# EAGLE board rev1 (EAGLE 9.6.0)
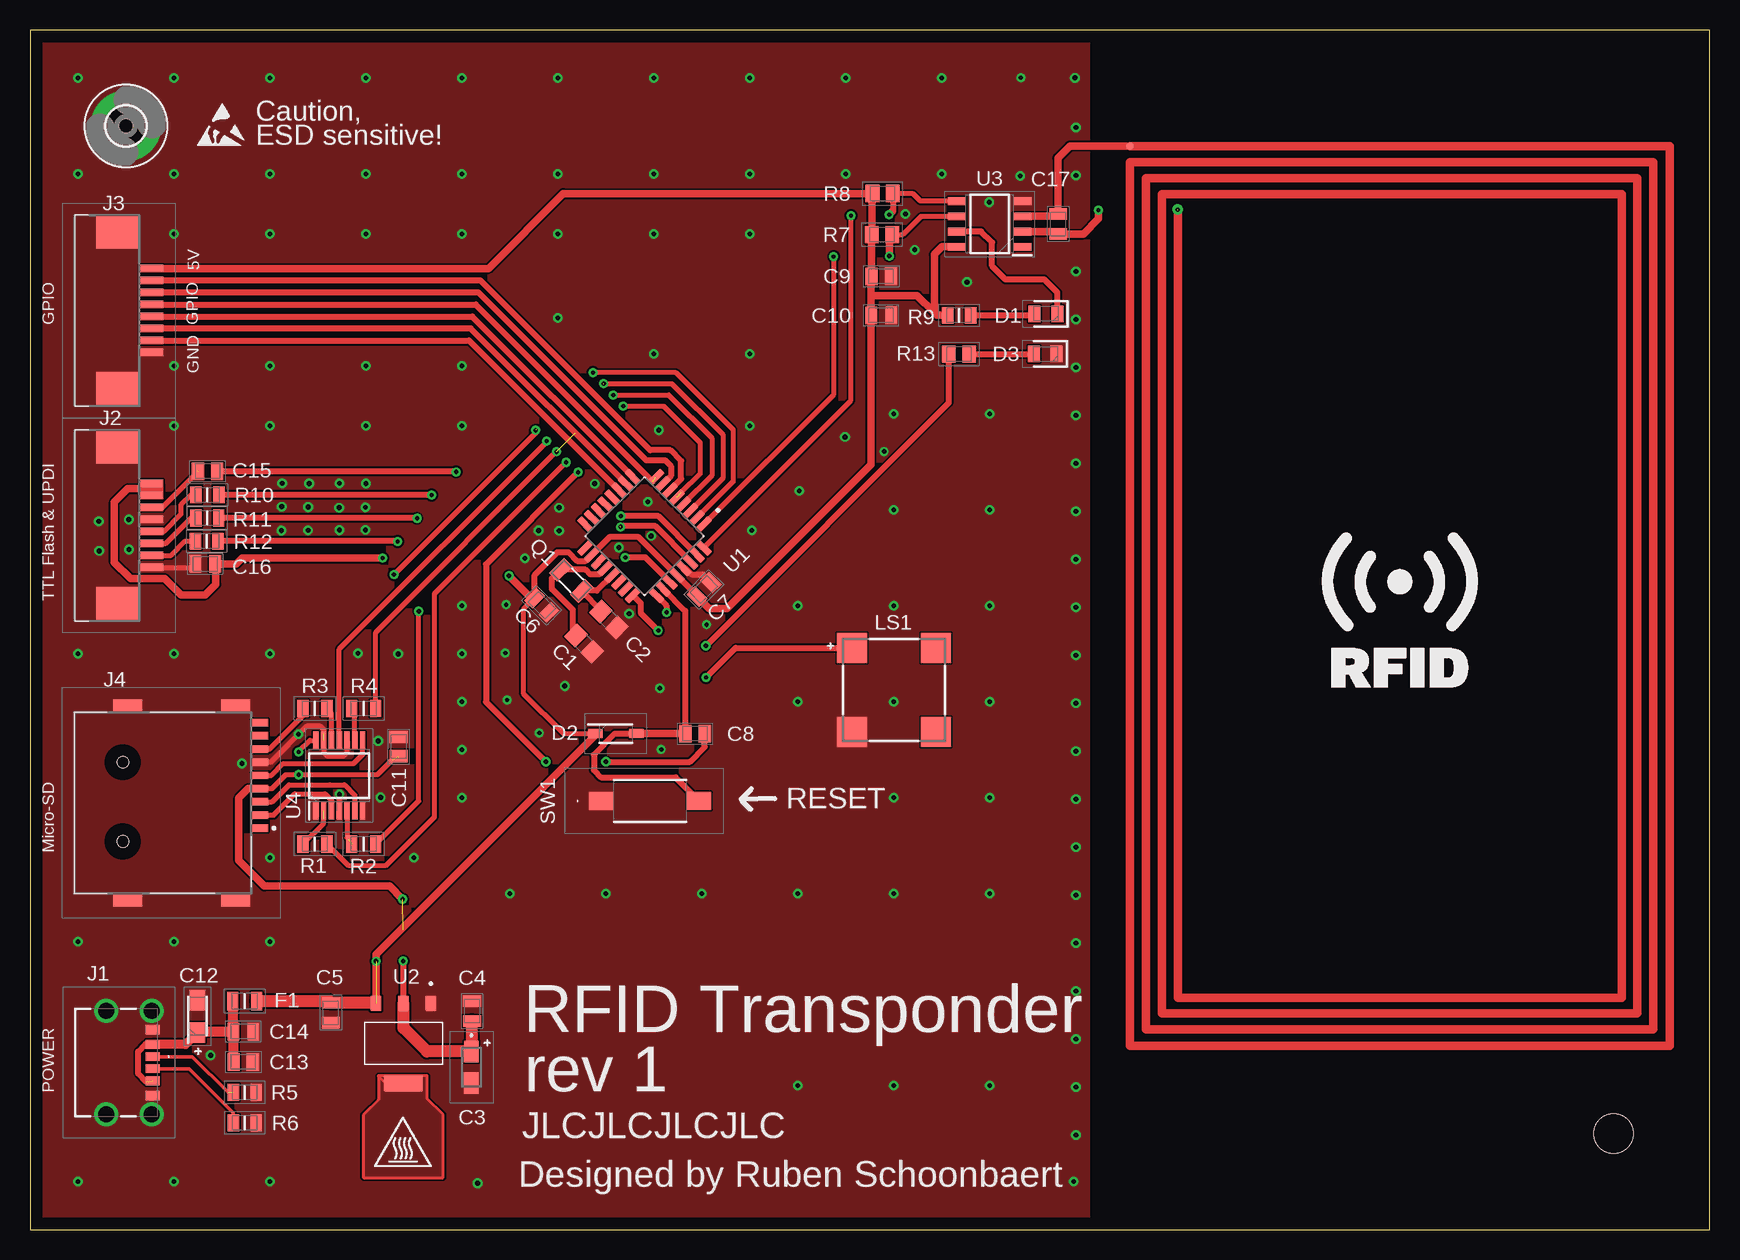
[diagram p0: board, top side]
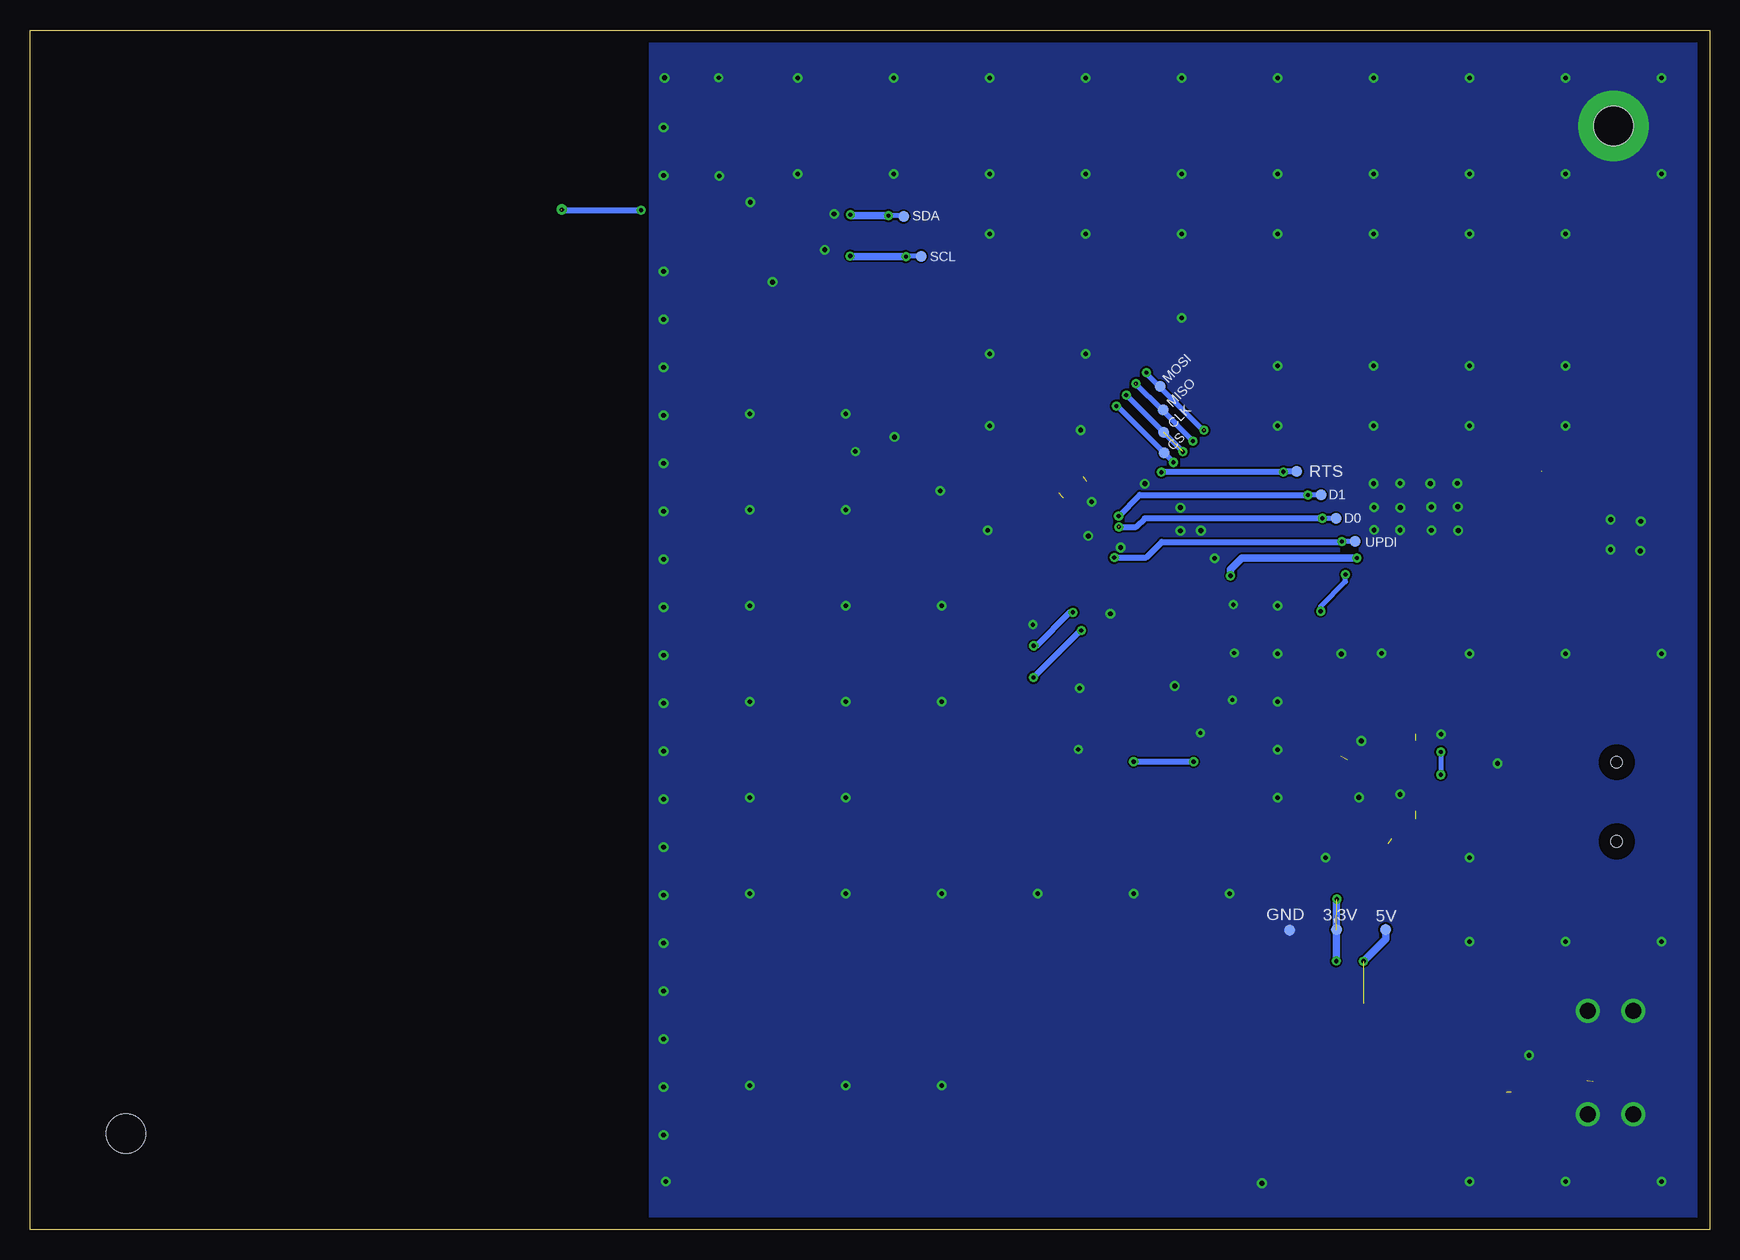
[diagram p1: board, bottom side, seen from below]

Size 140 x 100 mm. Coordinates in mm from the lower left corner, seen from the top.
Outline: 0,0 140,0 140,100 0,100 0,0
Copper layers (1*16): Top 0.035mm / dielectric 1.5mm / Bottom 0.035mm
Design rules "default *": minimum track width 6mil, minimum drill 0.35mm, track to track 6mil, track to pad 6mil, pad to pad 6mil, via to via 6mil, smd to smd 6mil, copper to edge 40mil, drill to drill 6mil, minimum pad ring 10mil, minimum via ring 8mil, stop-mask expansion 4mil, vias tented up to drill 15mm, thermal gap 10mil
Holes 3.3 mm at 132,8 8,92

## Footprints (pad centres in the part's own frame; a part is rotated, then mirrored left to right if it is on the bottom)
C0805 = smd 1.3 x 1.5: 1 -0.95,0; 2 0.95,0
T491A = smd 1.8 x 1.23: 1 -1.31,0; 2 1.31,0
CAPC2012X145N = smd 0.97 x 1.47: 1 -0.83,0; 2 0.83,0
CAPC2012X94N = smd 1.02 x 1.47: 1 -0.81,0; 2 0.81,0
CAPPM3216X180N = smd 1.7 x 1.3: 1 -1.35,0; 2 1.35,0
LEDC2012X80N = smd 1 x 1.4: 1 -0.95,0; 2 0.95,0
SOD3716X145N = smd 1.2 x 0.75: 1 -1.7,0; 2 1.7,0
FUSC2114X125N = smd 0.93 x 1.52: 1 -1,0; 2 1,0
3,3-PAD = drill 3.3 pad 5.842: B3,3 0,0
1016435900011LF = smd 0.7 x 1.2: A5 -0.5,3.03; B5 0.5,3.03 | smd 0.76 x 1.2: A9 1.52,3.03; B9 -1.52,3.03 | smd 0.8 x 1.2: A12 2.75,3.03; B12 -2.75,3.03 | drill 1.34 pad 1.85: MH1 -4.32,2.95; MH2 4.32,2.95 | drill 1.34 pad 2.01: MH3 -4.32,-0.85; MH4 4.32,-0.85
849528 = smd 0.61 x 2: 1 -3.5,3.2; 2 -2.5,3.2; 3 -1.5,3.2; 4 -0.5,3.2; 5 0.5,3.2; 6 1.5,3.2; 7 2.5,3.2; 8 3.5,3.2 | smd 2.68 x 3.6: MP1 -6.49,0.4; MP2 6.49,0.4
MEM20750014001A = smd 0.62 x 1.4: 1 2.105,7.725; 2 1.005,7.725; 3 -0.095,7.725; 4 -1.195,7.725; 5 -2.295,7.725; 6 -3.395,7.725; 7 -4.495,7.725; 8 -5.595,7.725; 9 -6.695,7.725 | smd 1.1 x 2.4: 10 -8.075,5.725; 11 -8.075,-3.275; 12 8.075,-3.275; 13 8.075,5.725 | hole 0.95: -3.395,-3.695; 3.205,-3.695
CMT-8540S-SMT-TR = smd 2.5 x 2.5: 1 -3.5,-3.5; 2 3.5,-3.5; 3 3.5,3.5; 4 -3.5,3.5
3.2X1.5 = smd 1 x 1.8: 1 -1.25,0; 2 1.25,0
RESC2012X50N = smd 0.95 x 1.45: 1 -1,0; 2 1,0
RESC2012X60N = smd 0.95 x 1.4: 1 -0.95,0; 2 0.95,0
RESC2012X65N = smd 1.15 x 1.45: 1 -0.85,0; 2 0.85,0
PTS636SM50SMTRLFS = smd 2 x 1.5: 1 -4.1,0; 2 4.1,0
TP09R = smd 0.9 x 0.9: TP 0,0
QFP80P900X900X120-32N = smd 1.47 x 0.55: 1 -4.17,2.8; 2 -4.17,2; 3 -4.17,1.2; 4 -4.17,0.4; 5 -4.17,-0.4; 6 -4.17,-1.2; 7 -4.17,-2; 8 -4.17,-2.8; 17 4.17,-2.8; 18 4.17,-2; 19 4.17,-1.2; 20 4.17,-0.4; 21 4.17,0.4; 22 4.17,1.2; 23 4.17,2; 24 4.17,2.8 | smd 0.55 x 1.47: 9 -2.8,-4.17; 10 -2,-4.17; 11 -1.2,-4.17; 12 -0.4,-4.17; 13 0.4,-4.17; 14 1.2,-4.17; 15 2,-4.17; 16 2.8,-4.17; 25 2.8,4.17; 26 2,4.17; 27 1.2,4.17; 28 0.4,4.17; 29 -0.4,4.17; 30 -1.2,4.17; 31 -2,4.17; 32 -2.8,4.17
SOT229P700X180-4N = smd 1.31 x 0.93: 1 -3.345,2.29; 2 -3.345,0; 3 -3.345,-2.29 | smd 1.31 x 3.24: 4 3.345,0
SOIC127P600X175-8N = smd 1.525 x 0.65: 1 -2.712,1.905; 2 -2.712,0.635; 3 -2.712,-0.635; 4 -2.712,-1.905; 5 2.712,-1.905; 6 2.712,-0.635; 7 2.712,0.635; 8 2.712,1.905
SOP65P640X110-14N = smd 1.475 x 0.45: 1 -2.938,1.95; 2 -2.938,1.3; 3 -2.938,0.65; 4 -2.938,0; 5 -2.938,-0.65; 6 -2.938,-1.3; 7 -2.938,-1.95; 8 2.938,-1.95; 9 2.938,-1.3; 10 2.938,-0.65; 11 2.938,0; 12 2.938,0.65; 13 2.938,1.3; 14 2.938,1.95
RF_COIL = drill 0.35: P$1 4,-5.3 | smd 0.635 x 0.635: P$3 0,0

## Placement (x,y rotation side)
C1  18pF  [C0805]  46.19,48.84 135 top
C2  18pF  [C0805]  48.25,50.85 135 top
C3  T491A226K004AT  [T491A]  36.8,13.53 270 top
C4  GRM21BR61C106KE15K  [CAPC2012X145N]  36.85,18.21 270 top
C5  GRM21BR61C106KE15K  [CAPC2012X145N]  25.08,18.08 90 top
C6  GRM21BR61C106KE15K  [CAPC2012X145N]  42.65,52.03 135 top
C7  08055C104KAT2A  [CAPC2012X94N]  56.17,53.35 45 top
C8  08055C104KAT2A  [CAPC2012X94N]  55.43,41.34 180 top
C9  08055C104KAT2A  [CAPC2012X94N]  70.95,79.47 0 top
C10  GRM21BR61C106KE15K  [CAPC2012X145N]  70.95,76.21 0 top
C11  08055C104KAT2A  [CAPC2012X94N]  30.73,40.26 270 top
C12  TAJA106K010YNJ  [CAPPM3216X180N]  13.97,17.78 90 top
C13  08055C104KAT2A  [CAPC2012X94N]  17.78,13.97 0 top
C14  GRM21BR61C106KE15K  [CAPC2012X145N]  17.78,16.51 0 top
C15  08055C104KAT2A  [CAPC2012X94N]  14.8,63.22 180 top
C16  GRM21BR61C106KE15K  [CAPC2012X145N]  14.61,55.5 0 top
C17  GRM21BR61C106KE15K  [CAPC2012X145N]  85.7,83.83 90 top
D1  SML-LXT0805GW-TR  [LEDC2012X80N]  84.69,76.34 180 top
D2  MMSZ5231B-7-F  [SOD3716X145N]  48.83,41.34 0 top
D3  SML-LXT0805GW-TR  [LEDC2012X80N]  84.63,73 180 top
F1  SMD0805B050TF  [FUSC2114X125N]  17.91,19.05 0 top
H1  MOUNT-PAD-ROUND3.3  [3,3-PAD]  8,92 0 top
J1  10164359-00011LF  [1016435900011LF]  7.2,13.91 270 top
J2  84952-8  [849528]  6.91,58.7 270 top
J3  84952-8  [849528]  6.91,76.62 270 top
J4  MEM2075-00-140-01-A  [MEM20750014001A]  11.43,35.56 270 top
LS1  CMT-8540S-SMT-TR  [CMT-8540S-SMT-TR]  72,45 270 top
Q1  32.768Khz  [3.2X1.5]  45.12,54.12 135 top
R1  CRCW08053K30FKEA  [RESC2012X50N]  23.75,32.13 180 top
R2  CRCW08053K30FKEA  [RESC2012X50N]  27.81,32.13 180 top
R3  CRCW08053K30FKEA  [RESC2012X50N]  23.75,43.43 180 top
R4  CRCW08053K30FKEA  [RESC2012X50N]  27.81,43.43 0 top
R5  RC0805FR-0710KL  [RESC2012X60N]  17.91,11.43 180 top
R6  RC0805FR-0710KL  [RESC2012X60N]  17.91,8.89 180 top
R7  RNCP0805FTD1K00  [RESC2012X65N]  71.02,82.94 180 top
R8  RNCP0805FTD1K00  [RESC2012X65N]  71.07,86.37 180 top
R9  RC0805FR-0710KL  [RESC2012X60N]  77.45,76.21 0 top
R10  RC0805FR-0710KL  [RESC2012X60N]  14.79,61.25 180 top
R11  RC0805FR-0710KL  [RESC2012X60N]  14.78,59.32 180 top
R12  RC0805FR-0710KL  [RESC2012X60N]  14.73,57.38 180 top
R13  RNCP0805FTD1K00  [RESC2012X65N]  77.44,72.98 0 top
SW1  TACTWITCH  [PTS636SM50SMTRLFS]  51.69,35.74 0 top
TP1  TPTP09R  [TP09R]  34.41,63.19 0 bottom
TP2  TPTP09R  [TP09R]  32.38,61.23 0 bottom
TP3  TPTP09R  [TP09R]  31.13,59.29 0 bottom
TP4  TPTP09R  [TP09R]  29.56,57.37 0 bottom
TP5  TPTP09R  [TP09R]  65.71,81.13 0 bottom
TP6  TPTP09R  [TP09R]  67.18,84.45 0 bottom
TP7  TPTP09R  [TP09R]  31.09,25 0 bottom
TP8  TPTP09R  [TP09R]  45.45,64.73 0 bottom
TP9  TPTP09R  [TP09R]  45.81,70.28 0 bottom
TP10  TPTP09R  [TP09R]  45.49,66.45 0 bottom
TP11  TPTP09R  [TP09R]  45.56,68.32 0 bottom
TP12  TPTP09R  [TP09R]  27,25 0 bottom
TP13  TPTP09R  [TP09R]  35,24.95 0 bottom
U1  ATMEGA3208-AFR  [QFP80P900X900X120-32N]  51.22,57.8 225 top
U2  AMS1117-3.3  [SOT229P700X180-4N]  31.13,15.51 270 top
U3  ST25DV16KC-IE6S3  [SOIC127P600X175-8N]  79.99,83.83 180 top
U4  74LVC125APW,118  [SOP65P640X110-14N]  25.78,37.85 90 top
U$1  RF-ANT  [RF_COIL]  91.67,90.33 0 top

## Library data of the parts
C1 C2 = rcl; SPICEPREFIX: C
C3 = SamacSys_Parts; DESCRIPTION: T491, Tantalum, MnO2 Tantalum, Commercial Grade, 22 uF, 10%, 4 VDC, 125C, -55C, 85C, SMD, MnO2, Molded, 6 % , 3.5 Ohms, 900 nA, 58.6 mg, 3216, 1.6mm, Height Max = 1.8mm, 2000, 156 Weeks; HEIGHT: 1.8mm; MANUFACTURER_NAME: KEMET; MANUFACTURER_PART_NUMBER: T491A226K004AT; MOUSER_PART_NUMBER: 80-T491A226K004AT; MOUSER_PRICE-STOCK: https://www.mouser.com/Search/Refine.aspx?Keyword=80-T491A226K004AT
C4-C6 C10 C14 C16 C17 = SamacSys_Parts; DESCRIPTION: Murata, 0805 (2012M) 10uF Multilayer Ceramic Capacitor MLCC 16V dc +/-10% , SMD GRM21BR61C106KE15K; HEIGHT: 1.45mm; MANUFACTURER_NAME: Murata Electronics; MANUFACTURER_PART_NUMBER: GRM21BR61C106KE15K; MOUSER_PART_NUMBER: 81-GRM21BR61C106KE5K; MOUSER_PRICE-STOCK: https://www.mouser.co.uk/ProductDetail/Murata-Electronics/GRM21BR61C106KE15K?qs=h0WOCFF19ULjTOS37upAEw%3D%3D
C7-C9 C11 C13 C15 = SamacSys_Parts; DESCRIPTION: 0805 X7R ceramic capacitor,100nF 50V AVX 0805 Standard 100nF Ceramic Multilayer Capacitor, 50 V dc, +125degC, X7R Dielectric, /-10% SMD; HEIGHT: 0.94mm; MANUFACTURER_NAME: AVX; MANUFACTURER_PART_NUMBER: 08055C104KAT2A; MOUSER_PART_NUMBER: 581-08055C104K; MOUSER_PRICE-STOCK: https://www.mouser.co.uk/ProductDetail/AVX/08055C104KAT2A?qs=2ujN4bDBNE9mJvapP%252BjopA%3D%3D
C12 = SamacSys_Parts; DESCRIPTION: Tantalum Capacitors - Solid SMD 10volts 10uF 10%; HEIGHT: 1.8mm; MANUFACTURER_NAME: AVX; MANUFACTURER_PART_NUMBER: TAJA106K010YNJ; MOUSER_PART_NUMBER: 581-TAJA106K010YNJ; MOUSER_PRICE-STOCK: https://www.mouser.com/Search/Refine.aspx?Keyword=581-TAJA106K010YNJ
D1 D3 = SamacSys_Parts; DESCRIPTION: LED,0805,Surface Mount,QuasarBrite Lumex SML-LXT0805GW-TR Green LED, 565 nm, 0805 Diffused, Rectangle Lens SMD Package; HEIGHT: 0.8mm; MANUFACTURER_NAME: Lumex; MANUFACTURER_PART_NUMBER: SML-LXT0805GW-TR; MOUSER_PART_NUMBER: 696-SML-LXT0805GW; MOUSER_PRICE-STOCK: https://www.mouser.co.uk/ProductDetail/Lumex/SML-LXT0805GW-TR?qs=9HInCHf8eFiVOx4SP694cA%3D%3D
D2 = SamacSys_Parts; DESCRIPTION: Zener Diode 5.1V 5% 500mW SOD123 Diodes Inc MMSZ5231B-7-F Zener Diode, 5.1V 5% 0.5 W SMT 2-Pin SOD-123; HEIGHT: 1.45mm; MANUFACTURER_NAME: Diodes Inc.; MANUFACTURER_PART_NUMBER: MMSZ5231B-7-F; MOUSER_PART_NUMBER: 621-MMSZ5231B-F; MOUSER_PRICE-STOCK: https://www.mouser.co.uk/ProductDetail/Diodes-Incorporated/MMSZ5231B-7-F?qs=2ygBApjwyeMh7Sf0YL1qSw%3D%3D
F1 = SamacSys_Parts; DESCRIPTION: Resettable Fuses - PPTC PPTC 6V 0.5A; HEIGHT: 1.25mm; MANUFACTURER_NAME: YAGEO; MANUFACTURER_PART_NUMBER: SMD0805B050TF; MOUSER_PART_NUMBER: 603-SMD0805B050TF; MOUSER_PRICE-STOCK: https://www.mouser.co.uk/ProductDetail/YAGEO/SMD0805B050TF?qs=0lSvoLzn4L91PoLHRQNgaQ%3D%3D
H1 = holes
J1 = SamacSys_Parts; DESCRIPTION: USB Type C Receptacle SMT Single Row 6Pin; HEIGHT: 3.41mm; MANUFACTURER_NAME: Amphenol; MANUFACTURER_PART_NUMBER: 10164359-00011LF; MOUSER_PART_NUMBER: 649-10164359-00011LF; MOUSER_PRICE-STOCK: https://www.mouser.co.uk/ProductDetail/Amphenol-FCI/10164359-00011LF?qs=MyNHzdoqoQLpQ%2FmSqA1%252BtQ%3D%3D
J2 J3 = SamacSys_Parts; DESCRIPTION: 8 way r/a bottom FFC SMT connector,1mm; HEIGHT: 2.74mm; MANUFACTURER_NAME: TE Connectivity; MANUFACTURER_PART_NUMBER: 84952-8; MOUSER_PART_NUMBER: 571-84952-8; MOUSER_PRICE-STOCK: https://www.mouser.co.uk/ProductDetail/TE-Connectivity/84952-8?qs=uUkeXfjQ8uTKEYAHE0dNDQ%3D%3D
J4 = SamacSys_Parts; DESCRIPTION: GCT (GLOBAL CONNECTOR TECHNOLOGY) - MEM2075-00-140-01-A - MICRO SD CARD CONN, PUSH-PUSH, 9POS, SMT; HEIGHT: mm; MANUFACTURER_NAME: GCT (GLOBAL CONNECTOR TECHNOLOGY); MANUFACTURER_PART_NUMBER: MEM2075-00-140-01-A; MOUSER_PART_NUMBER: 640-MEM20750014001A; MOUSER_PRICE-STOCK: https://www.mouser.co.uk/ProductDetail/GCT/MEM2075-00-140-01-A?qs=KUoIvG%2F9IlZvfWpeERlq3Q%3D%3D
LS1 = SamacSys_Parts; DESCRIPTION: MAGNETIC BUZZER TRANSDUCER, 4000 Hz; HEIGHT: mm; MANUFACTURER_NAME: CUI Devices; MANUFACTURER_PART_NUMBER: CMT-8540S-SMT-TR; MOUSER_PART_NUMBER: 490-CMT-8540S-SMT-TR; MOUSER_PRICE-STOCK: https://www.mouser.co.uk/ProductDetail/CUI-Devices/CMT-8540S-SMT-TR?qs=qCxwlXJ4fnyb8bN8CSFJVw%3D%3D
Q1 = crystal-geyer_V1_0
R1-R4 = SamacSys_Parts; DESCRIPTION: CRCW0805 Resistor T/R 0.125W,1%,3K3 Vishay CRCW Series Thick Film Surface Mount Resistor 805 Case 3.3k +/-1% 0.125W +/-100ppm/C; HEIGHT: 0.5mm; MANUFACTURER_NAME: Vishay; MANUFACTURER_PART_NUMBER: CRCW08053K30FKEA; MOUSER_PART_NUMBER: 71-CRCW0805-3.3K-E3; MOUSER_PRICE-STOCK: https://www.mouser.co.uk/ProductDetail/Vishay-Dale/CRCW08053K30FKEA?qs=kJXytlGtIWkHrvHHExLW2Q%3D%3D
R5 R6 R9-R12 = SamacSys_Parts; DESCRIPTION: YAGEO - RC0805FR-0710KL - SMD Chip Resistor, 10 kohm, +/- 1%, 125 mW, 0805 [2012 Metric], Thick Film, General Purpose; HEIGHT: 0.6mm; MANUFACTURER_NAME: YAGEO; MANUFACTURER_PART_NUMBER: RC0805FR-0710KL; MOUSER_PART_NUMBER: 603-RC0805FR-0710KL; MOUSER_PRICE-STOCK: https://www.mouser.co.uk/ProductDetail/YAGEO/RC0805FR-0710KL?qs=7bY8808IzHq6vrU3BeiiYw%3D%3D
R7 R8 R13 = SamacSys_Parts; DESCRIPTION: RES, 1 Kohm, 0805, 1%, 100 ppm, 0.25W; HEIGHT: 0.65mm; MANUFACTURER_NAME: Stackpole Electronics, Inc.; MANUFACTURER_PART_NUMBER: RNCP0805FTD1K00; MOUSER_PART_NUMBER: 708-RNCP0805FTD1K00; MOUSER_PRICE-STOCK: https://www.mouser.co.uk/ProductDetail/SEI-Stackpole/RNCP0805FTD1K00?qs=FESYatJ8odKy9z1hnQn%252Bhg%3D%3D
SW1 = SamacSys_Parts
TP1-TP13 = testpad
U1 = ATMEGA3208-AFR; AVAILABILITY: In Stock; CHECK_PRICES: https://www.snapeda.com/parts/ATMEGA3208-AFR/Microchip/view-part/?ref=eda; DESCRIPTION: AVR megaAVR® 0, Functional Safety (FuSa) Microcontroller IC 8-Bit 20MHz 32KB (32K x 8) FLASH 32-TQFP (7x7); MF: Microchip; MP: ATMEGA3208-AFR; PACKAGE: TQFP-32 Microchip; PRICE: None; PURCHASE-URL: https://www.snapeda.com/api/url_track_click_mouser/?unipart_id=2762707&manufacturer=Microchip&part_name=ATMEGA3208-AFR&search_term=None; SNAPEDA_LINK: https://www.snapeda.com/parts/ATMEGA3208-AFR/Microchip/view-part/?ref=snap
U2 = AMS1117-3.3; AVAILABILITY: Not in stock; CHECK_PRICES: https://www.snapeda.com/parts/AMS1117-3.3/Advanced+Monolithic+Systems/view-part/?ref=eda; DESCRIPTION: Sot223/Pkg 1-Amp 3.3-Volt Low Drop Out Voltage Regulatator; MF: Advanced Monolithic Systems; MP: AMS1117-3.3; PACKAGE: SOT-223 Seeed Technology; PRICE: None; SNAPEDA_LINK: https://www.snapeda.com/parts/AMS1117-3.3/Advanced+Monolithic+Systems/view-part/?ref=snap
U3 = SamacSys_Parts; DESCRIPTION: Dynamic NFC/RFID tag IC with 16-Kbit EEPROM, and fast transfer mode capability; HEIGHT: 1.75mm; MANUFACTURER_NAME: STMicroelectronics; MANUFACTURER_PART_NUMBER: ST25DV16KC-IE6S3; MOUSER_PART_NUMBER: 511-ST25DV16KC-IE6S3; MOUSER_PRICE-STOCK: https://www.mouser.co.uk/ProductDetail/STMicroelectronics/ST25DV16KC-IE6S3?qs=QNEnbhJQKvbFHl9iSDOFGA%3D%3D
U4 = SamacSys_Parts; DESCRIPTION: 74LVC125A - Quad buffer/line driver with 5 V tolerant input/outputs; 3-state@en-us; HEIGHT: 1.1mm; MANUFACTURER_NAME: Nexperia; MANUFACTURER_PART_NUMBER: 74LVC125APW,118; MOUSER_PART_NUMBER: 771-74LVC125APW-T; MOUSER_PRICE-STOCK: https://www.mouser.co.uk/ProductDetail/Nexperia/74LVC125APW118?qs=me8TqzrmIYV8VAZOS5KVLw%3D%3D
U$1 = mijn-library

## Nets
+3V3: C3.1 C4.2 C11.2 J4.4 TP7.TP U2.2 U4.14
+5V: C5.2 C6.2 C7.1 C9.1 C10.1 C16.2 D2.1 F1.2 J2.1 J2.2 J3.1 R7.2 R8.2 R9.1 TP12.TP U1.18 U1.28 U2.3 U3.8
CD$1: J4.2 U4.3
CLK: R4.2 TP10.TP U1.4
CS: R1.1 TP8.TP U1.5
D0: R11.1 TP3.TP U1.30
D1: R10.1 TP2.TP U1.31
EN: C15.2 J2.3
GND: C1.1 C2.1 C3.2 C4.1 C5.1 C6.1 C7.2 C9.2 C10.2 C11.1 C12.2 C13.2 C14.2 C16.1 D3.1 H1.B3,3 J1.A12 J1.B12 J1.MH1 J1.MH2 J1.MH3 J1.MH4 J2.4 J2.8 J2.MP1 J2.MP2 J3.8 J3.MP1 J3.MP2 J4.6 J4.10 J4.11 J4.12 J4.13 LS1.2 R5.1 R6.1 SW1.1 TP13.TP U1.19 U1.29 U2.1 U3.4 U4.1 U4.4 U4.7 U4.10 U4.13
GPIO8: J3.2 U1.6
GPIO9: J3.3 U1.7
GPIO10: J3.4 U1.8
GPIO11: J3.5 U1.9
GPIO12: J3.6 U1.10
GPIO13: J3.7 U1.11
GPIO24: LS1.1 U1.24
GPIO25: R13.1 U1.25
MISO: TP11.TP U1.3 U4.11
MOSI: R2.1 TP9.TP U1.2
N$1: C1.2 Q1.2 U1.20
N$2: C2.2 Q1.1 U1.21
N$3: J4.5 U4.8
N$5: J4.7 R3.2
N$6: J1.A5 R5.2
N$7: D1.1 U3.7
N$8: J4.3 U4.6
N$9: R1.2 U4.2
N$10: R2.2 U4.5
N$11: R3.1 U4.12
N$12: R4.1 U4.9
N$13: J1.B5 R6.2
N$14: D1.2 R9.2
N$15: C12.1 C13.1 C14.1 F1.1 J1.A9 J1.B9
N$16: D3.2 R13.2
N$17: J2.7 R12.2
N$18: C17.2 U3.3 U$1.P$3
N$19: C17.1 U3.2 U$1.P$1
N$20: U1.14
N$21: J2.5 R10.2
N$22: J2.6 R11.2
N$23: U1.15
N$24: U1.16
N$26: U1.17
RST: C8.2 D2.2 SW1.2 U1.26
RTS: C8.1 C15.1 TP1.TP
SCL: R7.1 TP5.TP U1.1 U3.6
SDA: R8.1 TP6.TP U1.32 U3.5
TAB: U2.4
UPDI: R12.1 TP4.TP U1.27

## Tracks (layer width: path | path; a pad name or v marks a point on that pad's centre or on a via)
+3V3  (via drill 0.35)  (2 unrouted)
  Top 0.4: v31.12,22.38 31.13,21.97
  Top 0.406: 30.19,39.14 28.97,37.92 v22.39,37.92
  Top 0.432: J4.4 20.09,36.76 | 20.09,36.76 20.1,36.76 | 20.09,36.76 20.18,36.76 21.35,37.92 v22.39,37.92 | v22.4,39.82 22.4,39.84 23.34,40.78 U4.14
  Top 0.508: U2.2 31.13,21.97 31.13,22.3
  Top 0.61: v22.39,37.92 | v31.07,27.54 29.98,28.63 19.53,28.63 17.4,30.76 17.4,35.97 18.18,36.76 J4.4
  Top 1.016: C4.2 36.8,17.33 C3.1 33.1,14.84 31.13,16.81 U2.2
  Bottom 0.152: v31.12,22.38 31.12,22.39
  Bottom 0.432: v22.4,39.82 v22.4,37.92 v22.39,37.92
  Bottom 0.61: v31.07,27.54 31.12,27.48 31.12,22.39
+5V  (via drill 0.35)  (1 unrouted)
  Top 0.254: 70.13,86.36 70.17,86.32
  Top 0.406: C6.2 41.12,51.67 41.11,51.67 41.11,44.69 44.46,41.34 D2.1
  Top 0.508: C7.1 55.6,52.85 U1.28 50.68,57.77 48.36,57.77 U1.18 46.85,56.27 46.32,55.74 45.62,55.74 44.88,56.48 43.97,56.48 42.06,54.58 C6.2 41.8,52.62
  Top 0.61: U3.8 76.02,81.92 75.39,81.3 75.39,76.42 | 75.39,76.42 75.6,76.21 R9.1 | 70.12,77.86 C10.1 70.12,63.77 58.11,51.76 56.62,51.76 C7.1 | 70.12,77.86 70.12,79.45 C9.1 70.14,82.91 R7.2 70.17,86.32 R8.2 | 75.39,76.42 73.95,77.86 70.12,77.86 | D2.1 47.13,41.21 28.84,22.92 U2.3 | J2.1 10.47,61.84 10.47,61.56 J2.2 | J2.2 9.47,61.84 | 9.47,61.84 9.47,62.14 10.11,61.5 J2.2 | J2.2 10.81,61.2 10.81,62.13 | 9.47,61.84 9.4,61.77 8.16,61.77 7.04,60.65 7.04,55.62 8.4,54.26 11.24,54.26 12.6,52.9 14.59,52.9 15.48,53.79 15.48,55.46 C16.2 17.19,55.5 17.67,55.98 v29.4,55.98 | J3.1 38.21,80.12 44.45,86.36 70.13,86.36 | v28.84,22.37 28.84,19.18 28.57,18.91 | v39.92,54.5 41.8,52.62
  Top 1.016: F1.2 24.95,19.04 C5.2 28.57,18.91
  Bottom 0.61: v29.4,55.98 38.97,55.98 38.97,55.97 39.92,55.02 v39.92,54.5 | v28.84,22.37 27,24.21 TP12.TP
CD$1
  Top 0.432: J4.2 20.32,34.55 22.08,36.32 24.6,36.32 25.13,35.79 U4.3
CLK  (via drill 0.35)  (1 unrouted)
  Top 0.406: R4.2 28.81,49.78 43.87,64.84 v43.89,64.84 | v48.62,69.57 53.23,69.57 56.84,65.96 56.84,62.85 U1.4
  Bottom 0.152: v43.89,64.84 v43.9,64.84
  Bottom 0.406: v48.62,69.57 v48.62,69.56 v43.9,64.84
CS  (via drill 0.35)  (1 unrouted)
  Top 0.406: v44.68,63.96 v44.67,63.97 33.71,53.01 33.71,34.39 29.69,30.37 26.51,30.37 R1.1 | v49.45,68.64 52.82,68.64 55.86,65.6 55.86,63 54.29,61.43
  Bottom 0.152: TP8.TP 45.37,64.65 45.35,64.65
  Bottom 0.406: v44.68,63.96 44.68,63.98 45.35,64.65 49.34,68.64 v49.45,68.64
D0  (via drill 0.35)  (1 unrouted)
  Top 0.508: U1.30 55.02,55.75 52.13,58.64 49.19,58.64 | R11.1 32.22,59.33 v32.26,59.29
  Bottom 0.406: TP3.TP v32.26,59.29
  Bottom 0.508: v32.26,59.29 47.08,59.29 47.79,58.58 v49.22,58.58
D1  (via drill 0.35)
  Top 0.508: U1.31 52.39,59.46 49.25,59.46 v49.25,59.48 | v33.47,61.23 33.45,61.25 R10.1
  Bottom 0.406: TP2.TP v33.47,61.23
  Bottom 0.508: v49.25,59.48 47.51,61.23 v33.47,61.23
EN  (1 unrouted)
  Top 0.406: J2.3 11,60.2 14,63.2
GND  (via drill 0.35, 0.4, 0.4 pad 0.5)  (1 unrouted)
  Top 0.4: U4.4 25.78,36.13 v25.79,36.28
  Top 0.406: J2.8 13.48,55.2 C16.1
  Top 0.432: J4.6 19.16,38.95 20.05,38.95 23.12,42.02 24.14,42.02 24.48,41.68 24.48,41.32 | U4.13 24.49,39.76 24.75,39.5 26.18,39.5 26.43,39.75 U4.10
  Top 0.508: U1.29 54.62,55.13 55.15,54.61 56.07,54.61 C7.2
  other vias: 52,73 60,73 52,83 60,83 60,67 44,76 44,83 87.19,71.87 87.19,67.87 87.19,63.87 87.19,59.87 87.19,55.87 87.19,51.87 87.19,47.87 87.19,43.87 87.19,39.87 87.19,35.87 87.19,31.87 87.19,27.87 87.19,23.87 87.19,19.87 87.19,15.87 87.19,11.87 87.19,7.87 87.19,87.87 87.19,91.87 87.11,96.01 52.42,66.65 51.5,60.66 52.5,45.13 44.57,45.31 36,52 36,48 36,44 36,40 36,36 12,48 20,48 4,48 4,24 12,24 20,24 4,4 12,4 20,4 40,28 48,28 56,28 64,28 72,28 80,28 80,12 72,12 37.31,3.85 80,36 80,44 72,44 64,44 64,52 80,52 80,60 72,60 80,68 12,72 12,67 20,72 20,67 28,72 28,67 4,96 4,88 12,88 12,96 20,96 20,88 28,88 28,96 36,96 36,88 44,96 52,96 60,96 68,96 76,96 72,68 78.1,78.99 73.75,81.68 72.97,84.66 87.19,75.87 87.19,79.87 44.11,60.18 47.07,62.18 25.77,60.18 25.79,62.21 23.27,62.19 23.19,60.23 20.98,60.26 21.02,62.21 20.95,58.27 23.18,58.29 25.79,58.31 28,62.19 27.96,60.2 27.96,58.32 44.1,58.25 42.39,58.27 41.25,55.95 49.94,51.33 60.17,58.3 64.12,61.58 67.94,66.07 29.22,36.02 29.02,40.73 22.37,41.29 17.66,38.85 27.34,48.04 30.69,47.99 8.25,56.69 8.24,59.19 5.77,56.57 5.73,59.04 82.54,87.84 79.96,85.65 44,88 52,88 60,88 68,88 76,88 15.05,14.52 49.09,56.86 72,52 72,36 56.4,50.42 71.2,64.87 20,31 32,31 64,12 82.59,96.03 36,72 36,67 20,83 28,83 36,83 12,83 51.78,57.82 87,4 39.68,52.09 39.62,48.07 39.77,44.14 42.45,41.39 52.62,40.01
  pour Top (no thermals): 0,0 0,100 88,100 88,0
  pour Bottom (no thermals): 0,0 0,100 88.17,100 88.17,0
GPIO8
  Top 0.508: U1.6 54.29,62.57 54.29,64.06 53.38,64.97 51.71,64.97 37.56,79.12 J3.2
GPIO9
  Top 0.508: J3.3 37.38,78.12 51.37,64.13 52.92,64.13 53.42,63.63 53.42,62.83 U1.7
GPIO10  (1 unrouted)
  Top 0.508: J3.4 37.15,77.12 51.91,62.36
GPIO11
  Top 0.508: J3.5 36.86,76.12 U1.9
GPIO12
  Top 0.508: U1.10 49.69,62.17 36.74,75.12 J3.6
GPIO13
  Top 0.508: J3.7 36.59,74.12 U1.11
GPIO24  (via drill 0.35)
  Top 0.5: U1.24 50.9,52.22 50.9,51.4 v52.37,49.93 | v56.35,46.02 58.83,48.5 LS1.1
  Bottom 0.5: v56.35,46.02 52.68,49.69 52.67,49.69 52.4,49.96 v52.37,49.93
GPIO25  (via drill 0.35)
  Top 0.5: U1.25 53.06,52 v53.06,51.45 | v56.34,48.66 76.59,68.92 R13.1
  Bottom 0.5: v53.06,51.45 53.34,51.45 56.12,48.66 v56.34,48.66
MISO  (via drill 0.35)  (1 unrouted)
  Top 0.406: U4.11 25.78,48.38 43.1,65.7 | v47.83,70.52 53.49,70.52 57.75,66.26 57.75,62.63 U1.3
  Top 0.61: 43.1,65.7 v43.06,65.73
  Bottom 0.152: TP11.TP 45.58,68.33 45.66,68.33
  Bottom 0.406: v43.06,65.73 45.66,68.33 47.8,70.47
MOSI  (via drill 0.35)  (1 unrouted)
  Top 0.406: R2.1 32.4,35.72 v32.4,51.54 v32.41,51.54 | v30.34,54.6 42.17,66.43 42.17,66.68 | v46.94,71.43 53.86,71.43 58.62,66.67 58.62,62.35 55.6,59.33 U1.2
  Bottom 0.152: TP9.TP 46.94,71.41 v46.94,71.43
  Bottom 0.406: v32.41,51.54 32.41,51.94 30.34,54.01 v30.34,54.6 | v46.94,71.43 46.94,71.35 42.22,66.63 v42.15,66.63
N$1
  Top 0.508: U1.20 47.46,54.61 46.7,54.61 46.31,55 Q1.2 43.52,54.28 43.52,53.39 45.26,51.65 45.26,49.78 C1.2
N$2
  Top 0.508: U1.21 47.25,53.26 46.04,53.26 Q1.1 47.58,51.66 C2.2
N$3
  Top 0.406: J4.5 20.12,37.85 21.11,38.84 26.97,38.84 27.73,39.6 U4.8
N$5
  Top 0.432: J4.7 19.98,40.05 22.75,42.83 R3.2
N$6  (1 unrouted)
  Top 0.305: J1.A5 13.53,14.41 16.51,11.43
N$7
  Top 0.508: D1.1 85.64,78.11 84.56,79.2 81.31,79.2 80.19,80.31 80.19,82.3 79.29,83.19 U3.7
N$8
  Top 0.406: J4.3 20.18,35.66 21.6,37.07 25,37.07 26.21,37.07 27.08,36.2 U4.6
N$9  (1 unrouted)
  Top 0.432: R1.2 24.47,33.85 24.47,34.23
N$10  (1 unrouted)
  Top 0.432: U4.5 26.43,32.68 26.54,32.57
N$11
  Top 0.432: U4.12 25.13,43.05 R3.1
N$12
  Top 0.432: U4.9 27.08,43.17 R4.1
N$13
  Top 0.305: J1.B5 13.26,13.41 16.96,9.71 R6.2
N$14
  Top 0.508: R9.2 83.61,76.21
  Top 0.61: 83.61,76.21 D1.2
N$15  (1 unrouted)
  Top 0.5: J1.B9 9.61,15.44 9,14.83 9,13.01 9.69,12.32
  Top 0.762: C12.1 12.97,15.43 J1.B9
  Top 0.813: C12.1 14.05,16.51 C14.1 | C14.1 16.95,13.99 C13.1 | F1.1 16.91,16.55 C14.1
N$16
  Top 0.5: R13.2 78.31,73 D3.2
N$17
  Top 0.406: J2.7 11.75,56.2 12.93,57.38 R12.2
N$18
  Top 0.61: U3.3 85.51,84.47 C17.2 85.67,84.69 85.67,89.33 86.67,90.33 U$1.P$3
N$19  (via drill 0.35)  (1 unrouted)
  Top 0.61: U3.2 85.51,83.19 C17.1 87.8,83 89.06,84.27 v89.06,84.97
  Bottom 0.5: 95.67,84.98 v89.07,84.98 v89.06,84.97
N$21
  Top 0.406: J2.5 11.17,58.2 12.6,59.63 12.6,60.43 13.42,61.25 R10.2
N$22
  Top 0.406: J2.6 11.3,57.2 13.42,59.32 R11.2
RST
  Top 0.508: U1.26 54.62,51.57 C8.2 | D2.2 50.51,41.32 48.74,41.32 47,39.58 47,38.3 47.6,37.7 53.83,37.7 SW1.2
  Top 0.61: D2.2 C8.2
RTS  (via drill 0.35)
  Top 0.508: C15.1 35.48,63.22 35.51,63.19 35.51,63.18 v35.53,63.16 | v45.69,63.13 38,55.44 38,44 v43,39 | v48,39 55,39 56.24,40.24 C8.1
  Bottom 0.508: TP1.TP 35.5,63.19 v35.53,63.16 45.7,63.16 45.71,63.15 v45.69,63.13 | v43,39 v48,39
SCL  (via drill 0.35)
  Top 0.406: R7.1 72.77,82.94 74.29,84.47 U3.6 | U1.1 67,69.62 v67,81.1
  Top 0.61: v67,81.1 v66.99,81.11 | v71.63,81.16 71.63,82.7 R7.1
  Bottom 0.406: TP5.TP 66.97,81.13 v66.99,81.11
  Bottom 0.61: v66.99,81.11 71.63,81.11 v71.63,81.16
SDA  (via drill 0.35)
  Top 0.406: U3.5 74.22,85.73 73.61,86.34 72,86.34 | 71.97,86.31 R8.1 | U1.32 68.43,69.11 v68.43,84.53 | 71.9,84.88 71.97,84.95
  Top 0.508: 71.97,84.95 71.97,85.42 71.97,86.31
  Top 0.61: v71.62,84.6 71.9,84.88 | 71.97,86.31 72,86.34
  Bottom 0.406: TP6.TP 67.26,84.53 v68.43,84.53
  Bottom 0.61: v68.43,84.53 71.62,84.53 v71.62,84.6
TAB
  Top 0.254: U2.4 29.7,12.16 29.08,12.78 29.07,12.76 29.06,12.75 29.06,10.87 29.06,10.82 27.86,9.63 27.79,9.55 27.79,4.34 27.81,4.32 34.42,4.32 34.42,9.6 33.12,10.9 33.1,10.9 33.1,12.8 33.07,12.83 29.06,12.83
  pour Top (isolate 0.254, no thermals): 29.21,12.7 29.21,10.79 27.94,9.53 27.94,4.45 34.29,4.45 34.29,9.53 33.02,10.79 33.02,12.7
UPDI  (via drill 0.35)
  Top 0.508: U1.27 51.29,56.03 v49.62,56.03 | v30.66,57.35 30.63,57.38 R12.1
  Bottom 0.406: TP4.TP 30.64,57.37 v30.66,57.35
  Bottom 0.508: v30.66,57.35 30.68,57.33 45.66,57.33 46.94,56.04 v49.61,56.04 v49.62,56.03

## Text on the board
tNames: Caution, | ESD sensitive! | 5V | GPIO | GPIO | GND | TTL Flash & UPDI | RESET | Micro-SD | RFID Transponder | POWER | rev 1 | JLCJLCJLCJLC | Designed by Ruben Schoonbaert
bNames: SDA | SCL | MOSI | MISO | CLK | CS | RTS | D1 | D0 | UPDI | 5V | 3,3V | GND